# Altium PCB WS100R06.PcbDoc
Units mm, origin at the board's own origin, x right, y up, seen from the top; angles counter-clockwise.
Board outline 37.54 x 28.85 mm, 2 copper layers (Top Layer, Bottom Layer); 22 components, 15 nets, 57 pads, 8 vias.
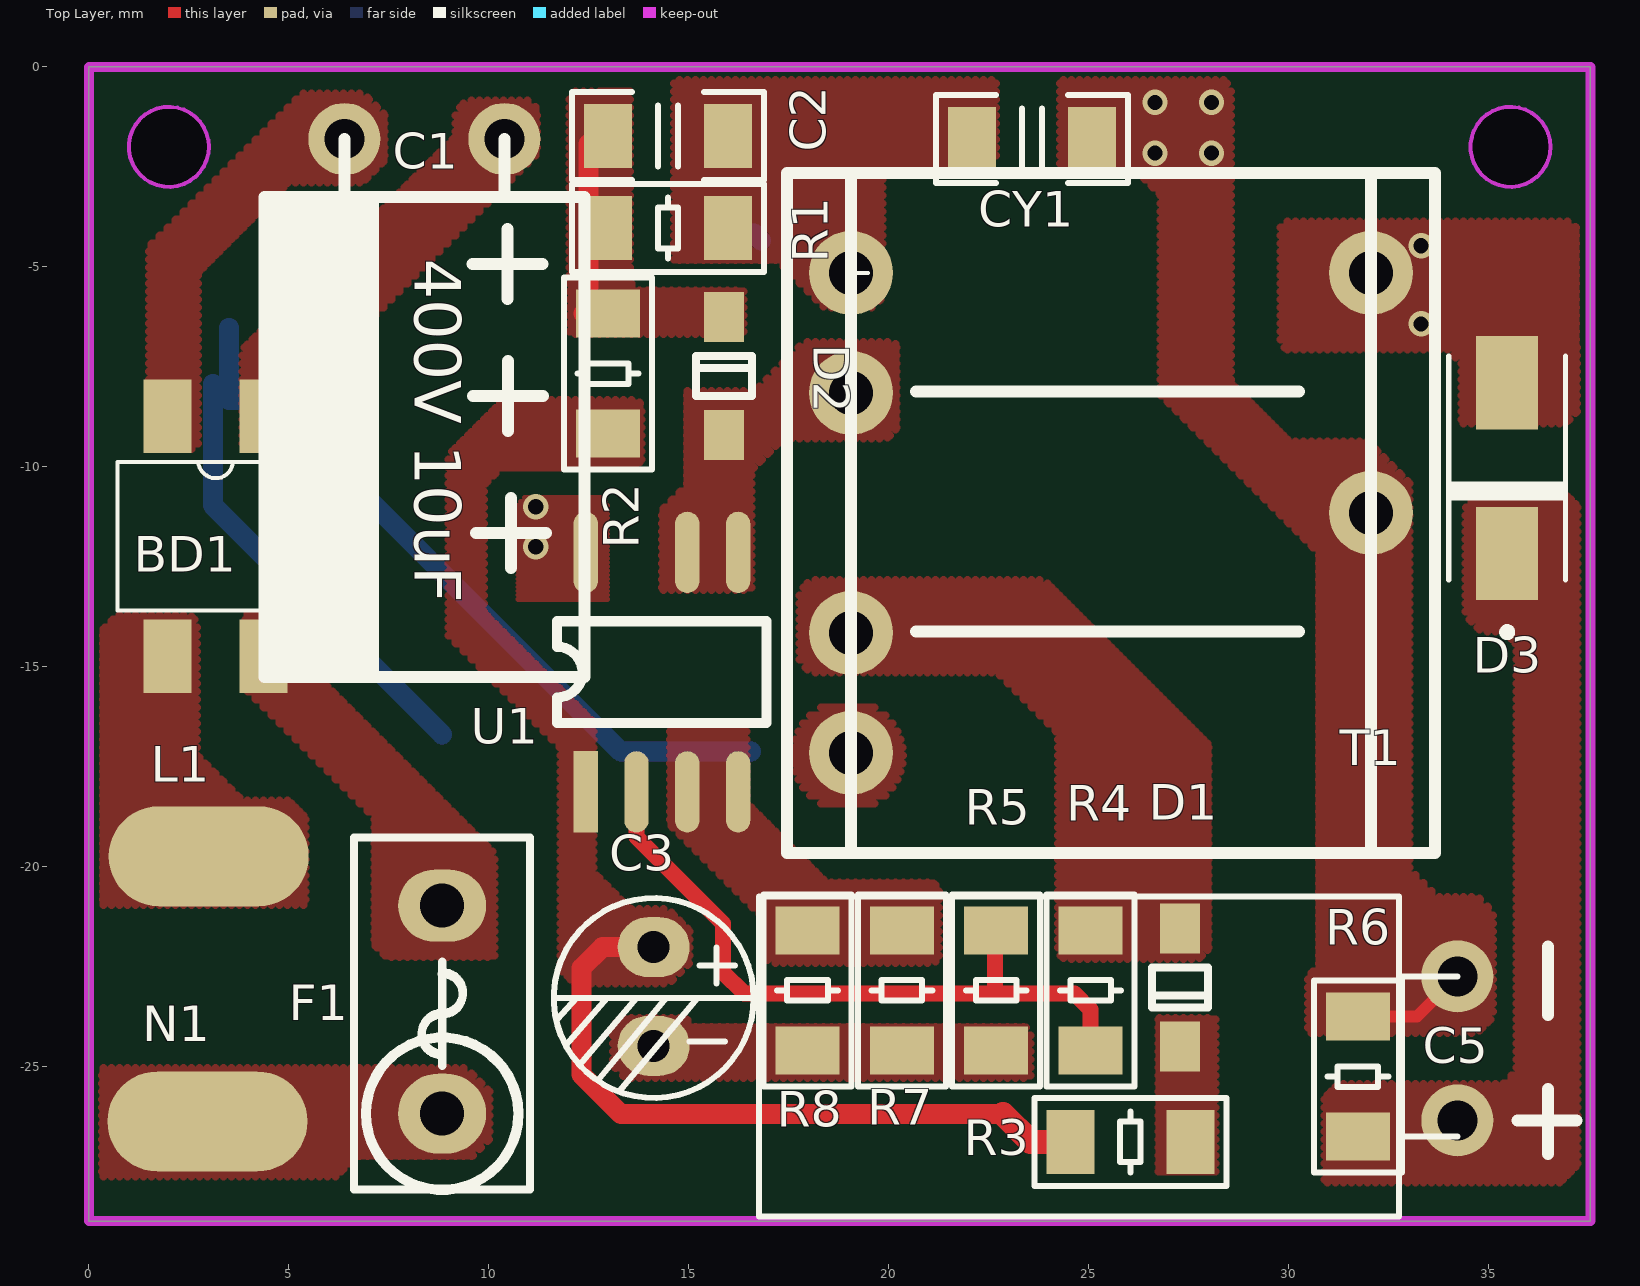
[diagram p0: Top Layer view]
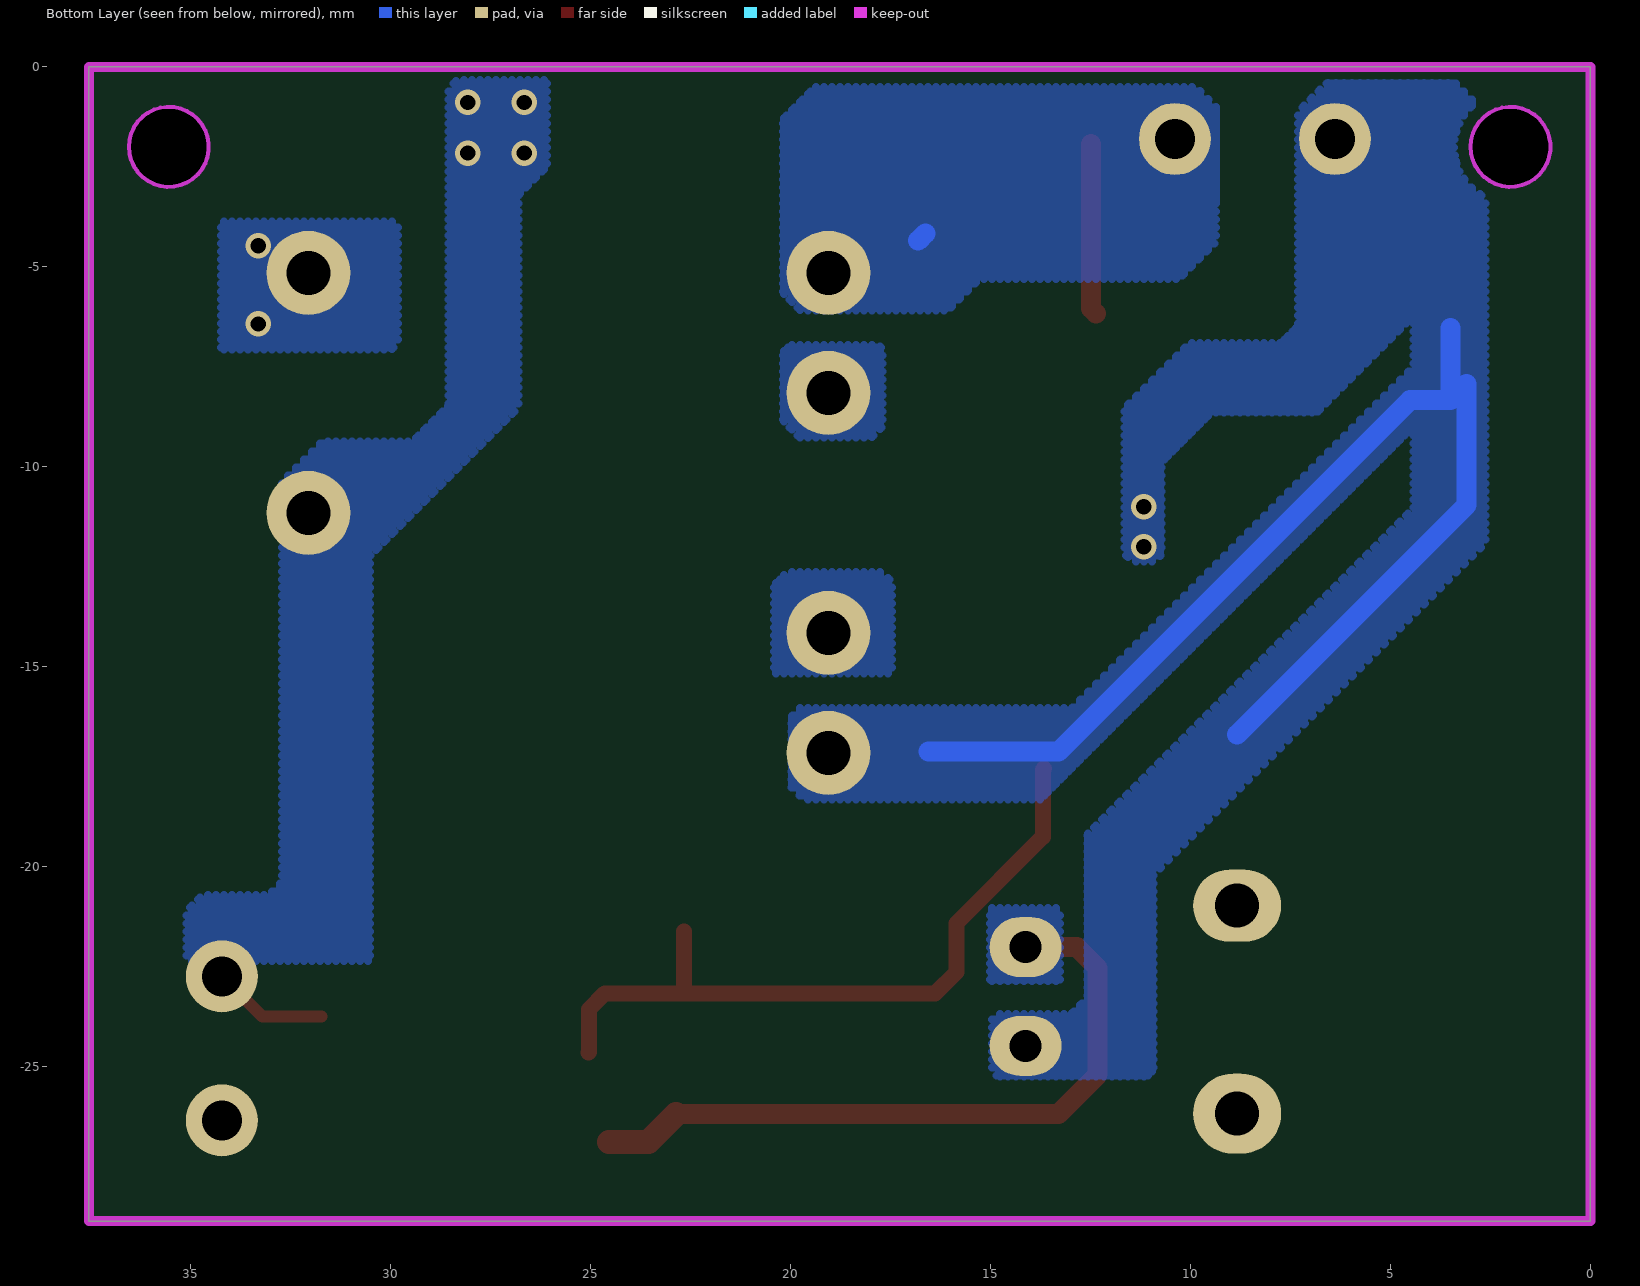
[diagram p1: Bottom Layer view, seen from below]

## Layer stack, top to bottom
Top Solder: solder mask 0.0102, Solder Resist, Dk 3.5
Top Layer: signal copper 0.0356
Dielectric 1: dielectric 0.32, FR-4, Dk 4.8
Bottom Layer: signal copper 0.0356
Bottom Solder: solder mask 0.0102, Solder Resist, Dk 3.5

## Board outline
0,-28.854 0,0 37.541,0 37.541,-28.854
cut-out: 35.541,-3 ccw(c35.541,-2) 36.541,-2 ccw(c35.541,-2) 35.541,-1 ccw(c35.541,-2) 34.541,-2 ccw(c35.541,-2)
cut-out: 2,-3 cw(c2,-2) 1,-2 cw(c2,-2) 2,-1 cw(c2,-2) 3,-2 cw(c2,-2)

## Design rules (kind name [scope] priority, off if disabled: settings)
Clearance Clearance_1 [OnLayer('Keep-Out Layer')] p1: gap=0.1 ignorepadtopadclearanceinfootprint=FALSE
Clearance [All] p2: gap=0.3 ignorepadtopadclearanceinfootprint=FALSE
PolygonConnect [All] p1: connectstyle=Direct reliefconductorwidth=0.254 reliefentries=4 polygonreliefangle="90 Angle" airgapwidth=0.254
RoomDefinition WS100 [InComponentClass('WS100')] p1: confinementstyle=ConfineIn formatcopy=TRUE lockcomponents=FALSE outline -132.634,-242.011 -81.834,-242.011 -81.834,-216.611 -132.634,-216.611
RoutingVias [All] p1: holewidth=0.711 width=1.27 viastyle="Through Hole" minholewidth=0.711 minwidth=1.27 maxholewidth=0.711 maxwidth=1.27
SolderMaskExpansion [All] p1: expansion=0.102
Width [All] p1: maxlimit=1.5 minlimit=0.3 preferedwidth=0.5
30 further rules are at their usual default settings.

## Components (designator, comment, footprint, x,y, rotation, side; value= is the part's Value field where it differs from the comment)
BD1 "MB10S/SOP-4" MBL10S 3.166,-11.731 r180 top
C1 "10uF/400V" "400V/10uF 8*12mm" 6.389,-1.803 r0 top locked value=?
C2 "1nF/1206/1KV/10%" C1206 14.478,-1.727 r0 top value=?
C3 "10uF/50V" 50V/10uF 14.122,-23.241 r0 top value=?
C5 "1000uF/16V" "16V/1000uF 8*16mm -2" 34.214,-24.74 r270 top locked value=?
CY1 "1nF/1206/1KV/10%" C1206 23.581,-1.805 r0 top value=?
D1 "FR107/SOD-123" SOD123 27.28,-21.539 r90 top
D2 "FR107/SOD-123" SOD123 15.875,-9.198 r270 top
D3 "SS310/SMA" SMA 35.458,-10.033 r90 top
F1 "保险丝3A/250V" 方块保险丝4*8mm 8.834,-23.571 r90 top
L1 "NC" PAD 2.997,-19.736 r180 top
N1 "NC" PAD 2.965,-26.365 r0 top
R1 "120K/1206/5%" R1206 14.478,-4.029 r0 top value=1K
R2 "6.8M/1206/5%" R1206 12.979,-7.671 r90 top value=1K
R3 "10R/1206/5%" R1206 26.036,-26.873 r0 top value=1K
R4 "20K/1206/1%" R1206 25.044,-23.088 r90 top value=1K
R5 "2.1K/1206/1%" R1206 22.685,-23.088 r90 top value=1K
R6 "5.1K/1206/5%" R1206 31.725,-25.248 r270 top value=1K
R7 "2R/1206/5%" R1206 20.325,-23.088 r270 top value=1K
R8 "2R/1206/5%" R1206 17.965,-23.088 r270 top value=1K
T1 "TRANS" EPC-17_2 25.552,-11.151 r0 top
U1 "LY2337/SOP-7" SOP-7 14.326,-15.131 r90 top

## Footprints (in the part's own frame and the unit in brackets; to place one, negate y for a bottom-side part, rotate by r counter-clockwise, add the part's x,y. Pads: shape width x height; smd on the part's side, far side on the other; paste and mask are expansions set on the pad)
"16V/1000uF 8*16mm -2" [mm]
  round 1.8 hole 1: 1(1.6,0) 2(-2,0)
  silkscreen extent -4,-17.48 4,0
50V/10uF [mm]
  oval 1.8x1.5 hole 0.8: 1(0,1.232) 2(0,-1.232)
  silkscreen extent -2.5,-2.54 2.5,2.46
"400V/10uF 8*12mm" [mm]
  round 1.8 hole 1: 1(4,0) 2(0,0)
  silkscreen extent -2,-13.45 6,0
C1206 [mm]
  rect 1.2x1.6 smd: 1(-1.5,0) 2(1.5,0)
  silkscreen extent -2.4,-1.1 2.4,1.1
EPC-17_2 [mm]
  round 2.1 hole 1.1: 1(-6.5,6) 2(-6.5,3) 3(-6.5,-3) 4(-6.5,-6) 5(6.5,0) 6(6.5,6)
  silkscreen extent -8.1,-8.5 8.1,8.5
MBL10S [mm]
  rect 1.2x1.84 smd: 1(-1.2,-3) 2(-1.2,3) 3(1.2,-3) 4(1.2,3)
  silkscreen extent -2.44,-1.85 2.46,1.85
PAD [mm]
  oval 5x2.5 smd: 1(0,0)
R1206 [mm]
  rect 1.2x1.6 smd: 1(-1.5,0) 2(1.5,0)
  silkscreen extent -2.4,-1.1 2.4,1.1
SMA [mm]
  rect 2.33x1.55 smd: 1(2.135,0) 2(-2.135,0)
  silkscreen extent -4.2,-1.5 2.8,1.46
SOD123 [mm]
  rect 1.25x1 smd: 1(0,0) 2(-2.95,0)
  silkscreen extent -1.98,-0.7 -0.98,0.7, body extent -3.37,-0.85 0.38,0.85, height 1.2
SOP-7 [mil]
  rect 80x24 smd: 1(-117.87,75)
  oval 80x24 smd: 2(-117.87,25) 3(-117.87,-25) 4(-117.87,-75) 5(117.87,-75) 6(117.87,-25) 7(117.87,75)
  silkscreen extent -50,-103 50,103, body extent -118,-96 118,96, height 67
方块保险丝4*8mm [mm]
  oval 2x2.2 hole 1.1: 1(-2.6,0)
  oval 1.8x2.2 hole 1.1: 2(2.6,0)
  silkscreen extent -4.5,-2.2 4.3,2.2

## Part data
BD1: library part Bridge2, "整流桥 MB10S/SOP-4", LatestRevisionDate=17-Jul-2002, LatestRevisionNote="Re-released for DXP Platform.", PackageDescription="Bridge Rectifier; 4 Terminals; Body 16.8 x 16.8 mm (typ); Pitch 10.67 mm", PackageReference=D-46_6A, Published=24-Mar-1999, Publisher="Altium Limited"
C1: library part "Cap Pol1", "直插电解电容10uF/400V", LatestRevisionDate=17-Jul-2002, LatestRevisionNote="Re-released for DXP Platform.", PackageDescription="Polarized Capacitor (Radial); 2 Leads", PackageReference=RB7.6-15, Published=8-Jun-2000, Publisher="Altium Limited"
C2 CY1: library part Cap, "1nF/1206/50V/10%", LatestRevisionDate=17-Jul-2002, LatestRevisionNote="Re-released for DXP Platform.", PackageDescription="Radial Cap, Thru-Hole; 2 Leads; 0.3 in Pin Spacing", PackageReference=RAD-0.3, Published=8-Jun-2000, Publisher="Altium Limited"
C3: library part "Cap Pol1", "直插电解电容10uF/50V", LatestRevisionDate=17-Jul-2002, LatestRevisionNote="Re-released for DXP Platform.", PackageDescription="Polarized Capacitor (Radial); 2 Leads", PackageReference=RB7.6-15, Published=8-Jun-2000, Publisher="Altium Limited"
C5: library part "Cap Pol1", "直插电解电容1000uF/16V", LatestRevisionDate=17-Jul-2002, LatestRevisionNote="Re-released for DXP Platform.", PackageDescription="Polarized Capacitor (Radial); 2 Leads", PackageReference=RB7.6-15, Published=8-Jun-2000, Publisher="Altium Limited"
D1 D2: library part Diode, "快恢复二极管 FR107 封装SOD-123", Code_JEDEC=DO-214-AB, LatestRevisionDate=17-Jul-2002, LatestRevisionNote="Re-released for DXP Platform.", PackageDescription="DO-214-AB/SMC; 2 C-Bend Leads; Body 7.9 x 5.9 mm, inc. leads (LxW)", PackageReference=SMC, PackageVersion=Sep-1996, Published=8-Jun-2000, Publisher="Altium Limited"
D3: library part Diode, "肖特基二极管 SS310/封装 SMA", Code_JEDEC=DO-214-AB, LatestRevisionDate=17-Jul-2002, LatestRevisionNote="Re-released for DXP Platform.", PackageDescription="DO-214-AB/SMC; 2 C-Bend Leads; Body 7.9 x 5.9 mm, inc. leads (LxW)", PackageReference=SMC, PackageVersion=Sep-1996, Published=8-Jun-2000, Publisher="Altium Limited"
F1: library part "Fuse 1", LatestRevisionDate=17-Jul-2002, LatestRevisionNote="Re-released for DXP Platform.", PackageDescription="Thru-Hole; 2 Leads", PackageReference=PIN-W2/E2.8, Published=8-Jun-2000, Publisher="Altium Limited"
L1 N1: library part Welding-hole, "焊接点"
R1: library part Res2, "Resistor 120K/1206/5%", LatestRevisionDate=17-Jul-2002, LatestRevisionNote="Re-released for DXP Platform.", PackageDescription="Axial Device, Thru-Hole; 2 Leads; 0.4 in Pin Spacing", PackageReference=AXIAL-0.4, Published=8-Jun-2000, Publisher="Altium Limited"
R2: library part Res2, "Resistor 6.8M/1206/5%  6.8兆欧姆", LatestRevisionDate=17-Jul-2002, LatestRevisionNote="Re-released for DXP Platform.", PackageDescription="Axial Device, Thru-Hole; 2 Leads; 0.4 in Pin Spacing", PackageReference=AXIAL-0.4, Published=8-Jun-2000, Publisher="Altium Limited"
R3: library part Res2, "Resistor 10R/1206/5%", LatestRevisionDate=17-Jul-2002, LatestRevisionNote="Re-released for DXP Platform.", PackageDescription="Axial Device, Thru-Hole; 2 Leads; 0.4 in Pin Spacing", PackageReference=AXIAL-0.4, Published=8-Jun-2000, Publisher="Altium Limited"
R4: library part Res2, "Resistor 20K/1206/1%", LatestRevisionDate=17-Jul-2002, LatestRevisionNote="Re-released for DXP Platform.", PackageDescription="Axial Device, Thru-Hole; 2 Leads; 0.4 in Pin Spacing", PackageReference=AXIAL-0.4, Published=8-Jun-2000, Publisher="Altium Limited"
R5: library part Res2, "Resistor 2.1K/1206/1%", LatestRevisionDate=17-Jul-2002, LatestRevisionNote="Re-released for DXP Platform.", PackageDescription="Axial Device, Thru-Hole; 2 Leads; 0.4 in Pin Spacing", PackageReference=AXIAL-0.4, Published=8-Jun-2000, Publisher="Altium Limited"
R6: library part Res2, "Resistor 5.1K/1206/5%", LatestRevisionDate=17-Jul-2002, LatestRevisionNote="Re-released for DXP Platform.", PackageDescription="Axial Device, Thru-Hole; 2 Leads; 0.4 in Pin Spacing", PackageReference=AXIAL-0.4, Published=8-Jun-2000, Publisher="Altium Limited"
R7 R8: library part Res2, "Resistor 2R/1206/5%", LatestRevisionDate=17-Jul-2002, LatestRevisionNote="Re-released for DXP Platform.", PackageDescription="Axial Device, Thru-Hole; 2 Leads; 0.4 in Pin Spacing", PackageReference=AXIAL-0.4, Published=8-Jun-2000, Publisher="Altium Limited"
T1: "变压器"
U1: library part Component_1

## Free pads (board coordinates)
  round 1 smd: 1(-4.346,-189.85) 1(139.606,-189.85)
  round 1.5 hole 1.5: 2(-4.346,-193.34) 2(139.606,-193.34)

## Via types
v1: diameter 0.635, hole 0.381, Top Layer to Bottom Layer, tented both sides, 8 vias

## Nets (pads, with @x,y where several pads share a name; then routed paths per layer and width w, separated by ;. In a path a pad name is that pad's centre, name@x,y a point inside that pad or via, vN(x,y) a via of type N, cw(c..) or ccw(c..) an arc to the next point about the centre after c; other vN are vias at no path point)
12V: C5.1 D3.2 R6.2
AGND: BD1.3 C1.2 C3.2 R5.1 R7.2 R8.2 T1.4 U1.7 | length 30.2
  Bottom Layer w0.5: 3.501,-6.527 3.501,-8.327 ; 8.834,-16.693 3.099,-10.958 3.099,-7.925 3.501,-8.327 ; 16.553,-17.119 13.3,-17.119 4.507,-8.327 3.501,-8.327
  other v1: 11.171,-11.998 11.171,-10.998
GND: C5.2 CY1.2 R6.1 T1.5 | length 2.9
  Top Layer w0.3: R6.1 33.199,-23.748 C5.2@34.239,-22.708
  other v1: 26.654,-2.157 28.067,-2.157 26.654,-0.889 28.067,-0.889
NetBD1_1: BD1.1 C1.1 C2.2 CY1.1 R1.2 T1.1 | length 0.3
  Bottom Layer w0.5: 16.628,-4.165 16.807,-4.344
NetC2_1: C2.1 D2.2 R1.1 R2.2 | length 4.3
  Top Layer w0.5: R2.2@12.362,-6.168 12.489,-6.041 C2.1@12.489,-1.927
NetC3_1: C3.1 R2.1 R3.1 U1.1 | length 17.6
  Top Layer w0.5: C3.1 12.84,-22.009 12.319,-22.53 12.319,-25.197 13.306,-26.184 22.857,-26.184
  Top Layer w0.6: 22.857,-26.184 23.546,-26.873 R3.1
NetD1_1: D1.1 R4.2 T1.3
NetD1_2: D1.2 R3.2
NetD2_1: D2.1 T1.2 U1.5 U1.6
NetD3_1: D3.1 T1.6
  other v1: 33.307,-6.426 33.307,-4.47
NetF1_1: F1.1 N1.1
NetR4_1: R4.1 R5.2 U1.2 | length 18.3
  Top Layer w0.3: R4.1@25.039,-24.633 R4.1@25.044,-24.639
  Top Layer w0.4: U1.2@13.665,-17.536 13.691,-17.561 13.691,-19.253 15.85,-21.412 15.85,-22.631 16.383,-23.165 22.555,-23.165 ; R5.2@22.657,-21.614 22.657,-23.063 22.555,-23.165 ; R4.1@25.044,-24.639 25.044,-24.638 25.039,-24.633 25.039,-23.566 24.638,-23.165 22.555,-23.165
NetR7_1: R7.1 R8.1 U1.3 U1.4
~220L: BD1.4 L1.1
~220N: BD1.2 F1.2

## Polygon pours and split planes (outlines as drawn)
NetC3_1 on Bottom Layer "NONET_L01_P-001" (hatched 90Degree grid 0.2 track 0.2, remove dead copper, pour order 472): 13.284,-21.031 15.011,-21.031 15.011,-22.86 13.259,-22.86 13.259,-21.057
GND on Bottom Layer "NONET_L01_P-001" (hatched 90Degree grid 0.2 track 0.2, remove dead copper, pour order 398): 28.55,-0.533 28.55,-8.459 29.464,-9.373 31.725,-9.373 32.716,-10.364 32.716,-20.372 33.045,-20.701 34.696,-20.701 35.104,-21.108 35.104,-22.352 30.506,-22.352 30.506,-12.217 26.798,-8.509 26.798,-3.2 26.087,-2.489 26.087,-0.33 28.347,-0.33
no net on Bottom Layer "NONET_L01_P-001" (hatched 90Degree grid 0.2 track 0.2, remove dead copper, pour order 428): 33.299,-25.959
no net on Bottom Layer "NONET_L01_P-001" (hatched 90Degree grid 0.2 track 0.2, remove dead copper, pour order 404): 30.48,-24.011
no net on Bottom Layer "NONET_L01_P-001" (hatched 90Degree grid 0.2 track 0.2, remove dead copper, pour order 402): 30.48,-24.384
NetD3_1 on Bottom Layer "NONET_L01_P-001" (hatched 90Degree grid 0.2 track 0.2, remove dead copper, pour order 396): 29.816,-3.937 29.816,-6.909 29.969,-7.061 34.239,-7.061 34.239,-3.861 29.893,-3.861
no net on Bottom Layer "NONET_L01_P-001" (hatched 90Degree grid 0.2 track 0.2, remove dead copper, pour order 314): -2.87,-30.095
no net on Bottom Layer "NONET_L01_P-001" (hatched 90Degree grid 0.2 track 0.2, remove dead copper, pour order 6): -1.989,-21.183
no net on Bottom Layer "NONET_L01_P-001" (hatched 90Degree grid 0.2 track 0.2, remove dead copper, pour order 242): -1.075,-29.049
NetBD1_1 on Bottom Layer "NONET_L01_P-001" (hatched 90Degree grid 0.2 track 0.2, remove dead copper, pour order 98): 9.856,-0.508 19.396,-0.508 20.193,-1.305 20.193,-5.648 19.745,-6.096 16.07,-6.096 15.283,-5.308 10.292,-5.308 9.365,-4.382 9.365,-0.999
NetD2_1 on Bottom Layer "NONET_L01_P-001" (hatched 90Degree grid 0.2 track 0.2, remove dead copper, pour order 148): 20.015,-6.96 17.794,-6.96 17.704,-7.049 17.704,-8.992 17.983,-9.271 19.761,-9.271 20.193,-8.839 20.193,-7.137
NetD1_1 on Bottom Layer "NONET_L01_P-001" (hatched 90Degree grid 0.2 track 0.2, remove dead copper, pour order 156): 17.465,-12.878 17.465,-15.164 20.413,-15.164 20.413,-12.956 20.081,-12.624 17.719,-12.624
no net on Bottom Layer "NONET_L01_P-001" (hatched 90Degree grid 0.2 track 0.2, remove dead copper, pour order 522): -0.025,-30.48
AGND on Bottom Layer "NONET_L01_P-001" (hatched 90Degree grid 0.2 track 0.2, remove dead copper, pour order 32): 6.601,-0.406 7.315,-1.121 7.315,-6.479 7.745,-6.909 10.034,-6.909 11.646,-8.521 11.646,-12.179 11.453,-12.371 10.902,-12.367 10.727,-12.192 10.727,-9.891 9.472,-8.636 6.833,-8.636 4.42,-6.223 4.42,-7.481 12.966,-16.027 19.761,-16.027 19.977,-16.244 19.977,-18.008 19.664,-18.321 13.755,-18.321 4.42,-8.986 4.42,-11.024 12.573,-19.177 12.573,-23.266 12.979,-23.673 14.859,-23.673 14.961,-23.774 14.961,-25.095 14.808,-25.248 11.1,-25.248 10.922,-25.07 10.922,-20.193 7.942,-17.213 2.624,-11.895 2.624,-1.161 3.378,-0.406
NetBD1_1 on Top Layer "NONET_L01_P-001" (hatched 90Degree grid 0.2 track 0.2, remove dead copper, pour order 490): 5.156,-9.541 5.156,-8.22 11.201,-2.175 11.201,-1.041 10.998,-0.838 9.449,-0.838 9.165,-1.122 9.165,-1.736 3.835,-7.066 3.835,-9.541
no net on Top Layer "NONET_L01_P-001" (hatched 90Degree grid 0.2 track 0.2, remove dead copper, pour order 488): 5.664,-12.09
AGND on Top Layer "NONET_L01_P-001" (hatched 90Degree grid 0.2 track 0.2, remove dead copper, pour order 486): 1.499,-9.474 1.499,-4.496 5.334,-0.66 6.855,-0.66 7.391,-1.197 7.391,-2.34 6.836,-2.896 4.978,-2.896 4.648,-3.226 2.731,-5.143 2.731,-9.486 2.667,-9.55 1.575,-9.55
~220N on Top Layer "NONET_L01_P-001" (hatched 90Degree grid 0.2 track 0.2, remove dead copper, pour order 484): 5.283,-13.665 5.283,-14.808 10.141,-19.666 10.141,-22.25 7.442,-22.25 7.137,-21.946 7.137,-18.771 4.597,-16.231 3.912,-15.545 3.912,-13.665
NetF1_1 on Top Layer "NONET_L01_P-001" (hatched 90Degree grid 0.2 track 0.2, remove dead copper, pour order 482): 0.311,-25.027 0.311,-27.737 6.182,-27.737 6.69,-27.229 9.587,-27.229 10.014,-26.802 10.014,-25.61 9.432,-25.027
no net on Top Layer "NONET_L01_P-001" (hatched 90Degree grid 0.2 track 0.2, remove dead copper, pour order 480): 0.533,-26.162
~220L on Top Layer "NONET_L01_P-001" (hatched 90Degree grid 0.2 track 0.2, remove dead copper, pour order 478): 0.356,-14.059 0.356,-20.955 5.41,-20.955 5.41,-18.76 4.989,-18.339 3.835,-18.339 2.709,-17.213 2.709,-13.885 2.529,-13.705 0.709,-13.705
no net on Top Layer "NONET_L01_P-001" (hatched 90Degree grid 0.2 track 0.2, remove dead copper, pour order 476): 1.118,-15.875
no net on Top Layer "NONET_L01_P-001" (hatched 90Degree grid 0.2 track 0.2, remove dead copper, pour order 452): 32.614,-32.969
no net on Top Layer "NONET_L01_P-001" (hatched 90Degree grid 0.2 track 0.2, remove dead copper, pour order 450): 32.614,-32.969
no net on Top Layer "NONET_L01_P-001" (hatched 90Degree grid 0.2 track 0.2, remove dead copper, pour order 418): 0.533,-20.117
no net on Top Layer "NONET_L01_P-001" (hatched 90Degree grid 0.2 track 0.2, remove dead copper, pour order 416): 0.533,-20.117
NetC3_1 on Top Layer "NONET_L01_P-001" (hatched 90Degree grid 0.2 track 0.2, remove dead copper, pour order 412): 10.363,-8.331 13.699,-8.331 13.818,-8.45 13.818,-9.843 13.65,-10.011 10.321,-10.011 9.881,-10.452 9.881,-13.646 12.619,-16.385 12.619,-20.138 13.538,-21.057 14.478,-21.057 15.011,-21.59 15.011,-22.2 15.011,-22.403 14.503,-22.911 12.141,-22.911 11.786,-22.555 11.786,-20.498 11.786,-17.018 8.992,-14.224 8.992,-9.703
no net on Top Layer "NONET_L01_P-001" (hatched 90Degree grid 0.2 track 0.2, remove dead copper, pour order 408): 32.715,-29.185
GND on Top Layer "NONET_L01_P-001" (hatched 90Degree grid 0.2 track 0.2, remove dead copper, pour order 394): 28.55,-0.508 28.55,-7.899 30.023,-9.373 31.979,-9.373 33.02,-10.414 33.02,-20.065 33.707,-20.752 34.722,-20.752 35.103,-21.133 35.103,-23.749 34.696,-24.155 30.48,-24.155 30.48,-22.733 30.759,-22.454 30.759,-12.167 26.797,-8.204 26.797,-3.2 26.137,-2.54 24.282,-2.54 24.282,-0.254 28.296,-0.254
12V on Top Layer "NONET_L01_P-001" (hatched 90Degree grid 0.2 track 0.2, remove dead copper, pour order 392): 30.963,-27.889 36.779,-27.889 37.262,-27.407 37.262,-11.024 36.982,-10.744 34.696,-10.744 34.417,-11.024 34.417,-13.716 34.823,-14.122 35.382,-14.122 35.687,-14.427 35.687,-25.095 35.357,-25.425 31.242,-25.425 30.886,-25.781 30.886,-27.813
NetD3_1 on Top Layer "NONET_L01_P-001" (hatched 90Degree grid 0.2 track 0.2, remove dead copper, pour order 388): 29.786,-3.937 29.786,-6.909 29.938,-7.061 37.05,-7.061 37.177,-6.934 37.177,-4.013 37.025,-3.861 29.862,-3.861
no net on Top Layer "NONET_L01_P-001" (hatched 90Degree grid 0.2 track 0.2, remove dead copper, pour order 386): 30.175,-6.35
NetD1_2 on Top Layer "NONET_L01_P-001" (hatched 90Degree grid 0.2 track 0.2, remove dead copper, pour order 382): 26.746,-23.749 26.746,-27.611 28.165,-27.611 28.165,-23.774 26.721,-23.774
no net on Top Layer "NONET_L01_P-001" (hatched 90Degree grid 0.2 track 0.2, remove dead copper, pour order 376): 23.495,-22.411
no net on Top Layer "NONET_L01_P-001" (hatched 90Degree grid 0.2 track 0.2, remove dead copper, pour order 332): 18.212,-29.105
no net on Top Layer "NONET_L01_P-001" (hatched 90Degree grid 0.2 track 0.2, remove dead copper, pour order 308): -2.37,-60.049
no net on Top Layer "NONET_L01_P-001" (hatched 90Degree grid 0.2 track 0.2, remove dead copper, pour order 282): 20.109,-21.873
no net on Top Layer "NONET_L01_P-001" (hatched 90Degree grid 0.2 track 0.2, remove dead copper, pour order 280): 37.457,-38.688
AGND on Top Layer "NONET_L01_P-001" (hatched Horizontal grid 0.2 track 0.2, remove dead copper, pour order 152): 17.602,-17.211 ccw(c18.976,-17.211) 18.976,-18.586 ccw(c18.976,-17.211) 20.351,-17.211 ccw(c18.976,-17.211) 18.976,-15.837 ccw(c18.976,-17.211)
NetBD1_1 on Top Layer "NONET_L01_P-001" (hatched 90Degree grid 0.2 track 0.2, remove dead copper, pour order 144): 14.633,-4.826 17.196,-4.826 18.381,-6.011 19.592,-6.011 19.837,-5.766 19.837,-2.591 19.964,-2.464 22.504,-2.464 22.682,-2.286 22.682,-0.076 14.633,-0.076
no net on Top Layer "NONET_L01_P-001" (hatched 90Degree grid 0.2 track 0.2, remove dead copper, pour order 0): -1.989,-18.135
no net on Top Layer "NONET_L01_P-001" (hatched 90Degree grid 0.2 track 0.2, remove dead copper, pour order 2): 0.678,-18.008
no net on Top Layer "NONET_L01_P-001" (hatched 90Degree grid 0.2 track 0.2, remove dead copper, pour order 252): 2.862,-32.394
NetD1_1 on Top Layer "NONET_L01_P-001" (hatched 90Degree grid 0.2 track 0.2, remove dead copper, pour order 150): 18.038,-15.138 22.708,-15.138 24.232,-16.662 24.232,-22.149 24.384,-22.301 27.737,-22.301 27.991,-22.047 27.991,-16.942 23.876,-12.827 18.047,-12.827 17.765,-13.108 17.765,-14.865
NetD2_1 on Top Layer "NONET_L01_P-001" (hatched 90Degree grid 0.2 track 0.2, remove dead copper, pour order 146): 16.561,-13.081 16.561,-10.083 17.348,-9.296 17.518,-9.296 19.939,-9.296 20.193,-9.042 20.193,-6.96 20.117,-6.883 17.87,-6.883 16.651,-8.102 14.953,-8.102 14.953,-10.449 14.326,-11.077 14.326,-13.081 14.953,-13.081
no net on Top Layer "NONET_L01_P-001" (hatched 90Degree grid 0.2 track 0.2, remove dead copper, pour order 248): 34.892,-34.579
no net on Top Layer "NONET_L01_P-001" (hatched 90Degree grid 0.2 track 0.2, remove dead copper, pour order 168): 43.477,-12.663
no net on Top Layer "NONET_L01_P-001" (hatched 90Degree grid 0.2 track 0.2, remove dead copper, pour order 162): 43.477,-14.262
no net on Top Layer "NONET_L01_P-001" (hatched 90Degree grid 0.2 track 0.2, remove dead copper, pour order 164): 43.477,-14.462
no net on Top Layer "NONET_L01_P-001" (hatched 90Degree grid 0.2 track 0.2, remove dead copper, pour order 494): 33.858,-32.969
no net on Top Layer "NONET_L01_P-001" (hatched 90Degree grid 0.2 track 0.2, remove dead copper, pour order 518): 7.546,-29.538
NetD3_1 on Top Layer "NONET_L01_P-001" (hatched 90Degree grid 0.2 track 0.2, remove dead copper, pour order 526): 33.965,-7.061 34.315,-7.411 34.315,-8.915 36.906,-8.915 37.208,-8.614 37.208,-6.811 34.215,-6.811
NetR7_1 on Top Layer "NONET_L01_P-001" (hatched 90Degree grid 0.2 track 0.2, remove dead copper, pour order 370): 14.529,-16.408 16.281,-16.408 16.446,-16.573 16.446,-18.402 18.44,-20.396 21.107,-20.396 21.26,-20.549 21.26,-22.276 21.133,-22.403 17.043,-22.403 16.866,-22.225 16.866,-21.285 14.529,-18.948
AGND on Top Layer "NONET_L01_P-001" (hatched 90Degree grid 0.2 track 0.2, remove dead copper, pour order 374): 13.106,-23.978 13.106,-24.968 13.411,-25.273 23.546,-25.273 23.546,-24.13 23.419,-24.003 15.138,-24.003 14.91,-23.774 13.31,-23.774
NetC2_1 on Top Layer "NONET_L01_P-001" (hatched 90Degree grid 0.2 track 0.2, remove dead copper, pour order 132): 12.014,-6.68 16.365,-6.68 16.365,-5.588 13.741,-5.588 13.526,-5.372 13.525,-0.611 12.014,-0.611 12.014,-2.887
AGND on Top Layer "Top Layer-AGND" (hatched Horizontal grid 0.102 track 0.127, remove dead copper, pour order 528): 10.727,-10.932 10.727,-13.369 12.966,-13.369 12.966,-10.934 12.709,-10.677 10.983,-10.677

## Keep-outs
Keep-Out Layer:
  circle w0.1: c35.541,-2 r1
  circle w0.1: c2,-2 r1
  lines w0.254: 0,-28.854 37.541,-28.854 37.541,0 0,0 0,-28.854

## Other copper
Top Layer:
  region: 34.265,-35.657
Bottom Layer:
  pour cut-out: 3.853,-27.156
  region net GND: 39.337,-31.562

## Silkscreen, mask and mechanical layers (free items; w line width, h text height)
Top Overlay:
  lines w0.3: 35.712,-26.34 37.186,-26.34 ; 36.474,-27.178 36.474,-25.552 ; 36.474,-23.698 36.474,-21.996

## Text inside footprints (layer, text, board x,y; h text height)
C1: Top Overlay "400V 10uF" at 7.76,-4.801 h2 r270